# Altium PCB SENSEI_Base-Board_Clean.PcbDoc (part 7 of 7)
Units mm, origin at the board's own origin, x right, y up, seen from the top; angles counter-clockwise.
Board outline 25.2 x 15.15 mm, 8 copper layers (Top Sig/Pwr, GND1, Sig1, GND2, Sig2, Pwr, GND3, Bot Sig/Pwr), stack 1.53 mm thick; 187 components, 192 nets, 951 pads, 1831 vias.
Unrouted connection lines stored in the file: 214.
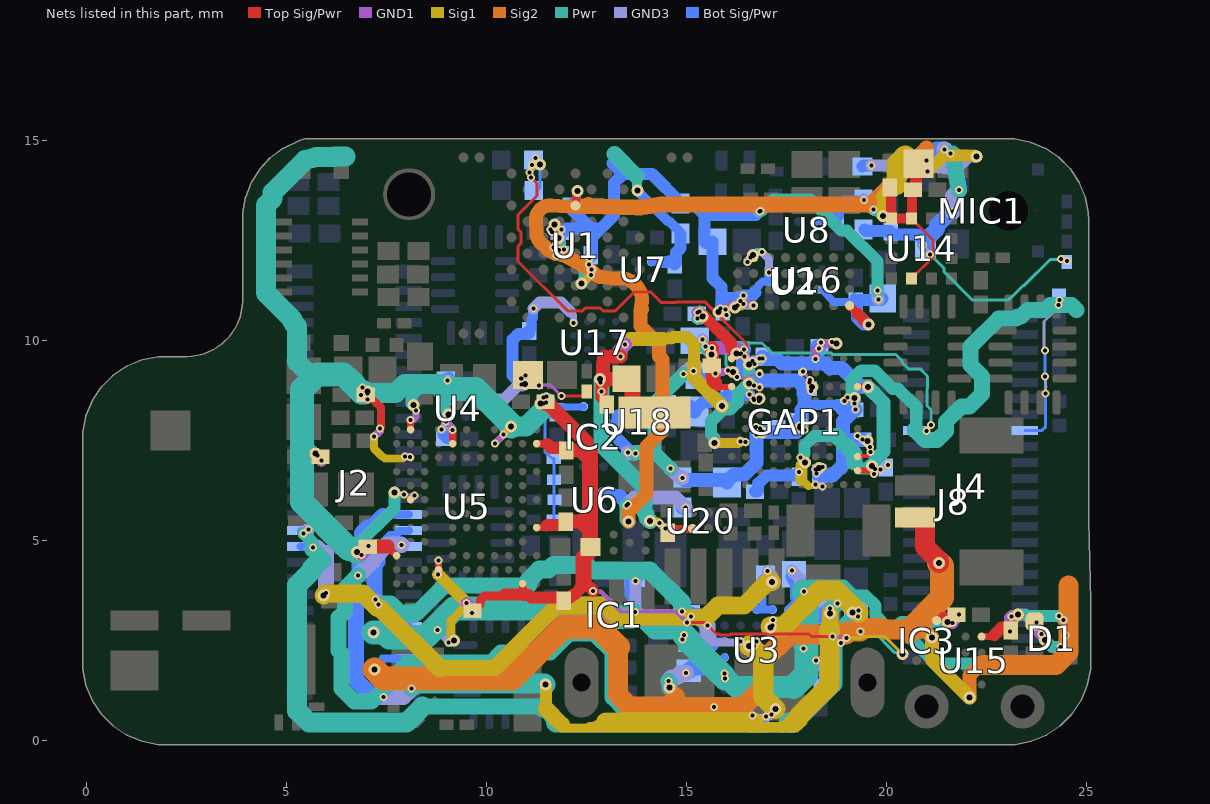
[diagram p12: the nets of this part, all layers, seen from the top]

## Via types
v1: diameter 0.2, hole 0.1, Top Sig/Pwr to GND1, 467 vias
v2: diameter 0.2, hole 0.1, GND3 to Bot Sig/Pwr, 431 vias
v3: diameter 0.2, hole 0.1, GND1 to Sig1, 369 vias
v4: diameter 0.3, hole 0.15, Sig1 to Pwr, 279 vias
v5: diameter 0.2, hole 0.1, Pwr to GND3, 270 vias
v6: diameter 0.3, hole 0.15, Top Sig/Pwr to Bot Sig/Pwr, tented both sides, 15 vias

## Nets (pads, with @x,y where several pads share a name; then routed paths per layer and width w, separated by ;. In a path a pad name is that pad's centre, name@x,y a point inside that pad or via, vN(x,y) a via of type N, cw(c..) or ccw(c..) an arc to the next point about the centre after c; other vN are vias at no path point) (continued)
V1p8_CSI2_SW: C85.1 C86.1 C87.1 GAP1.C7 U18.A1 | length 3.8
  Top Sig/Pwr w0.18: v1(16.806,8.488) 16.813,8.488 GAP1.C7@16.825,8.5
  GND1 w0.18: v3(16.684,8.514) 16.69,8.514 16.712,8.492 16.803,8.492 v1(16.806,8.488)
  GND3 w0.18: v2(16.575,8.65) v5(16.675,8.55)
  Sig1 w0.18: v3(16.684,8.514) 16.69,8.514 16.705,8.53 16.798,8.53 v4(16.821,8.553)
  Pwr w0.18: v4@16.784,8.517 v4(16.821,8.553) ; v4@16.818,8.55 v5(16.675,8.55) v4@16.818,8.55 ; v4@16.818,8.55 v4(16.821,8.553) ; v4@16.818,8.55 v4(16.821,8.553)
  Bot Sig/Pwr w0.2: U18.A1@13.975,8.175 13.982,8.175 14.182,8.375 14.275,8.375
  Bot Sig/Pwr w0.3: C87.1@15.2,8.226 15.2,8.25 15.403,8.453 15.573,8.453 15.676,8.557 15.994,8.557 16.025,8.588 C86.1@16.025,8.634 v2@16.566,8.634
  Bot Sig/Pwr w0.35: 14.275,8.375 14.544,8.375 C85.1@14.55,8.381 ; C85.1@14.55,8.409 C85.1@14.55,8.381 ; C87.1@15.2,8.226 15.069,8.357 14.556,8.357 14.55,8.363 C85.1@14.55,8.381
V_GAP9: C25.1 C26.1 C27.1 C28.1 C29.1 C30.1 C31.1 C32.1 C55.1 C56.1 C84.1 GAP1.A8 GAP1.B10 GAP1.C5 GAP1.F5 GAP1.F9 GAP1.G2 GAP1.J7 GAP1.K3 J4.13 R5.2 R14.2 R15.2 R22.2 U18.A2 | length 49.6
  Top Sig/Pwr w0.075: v1(11.112,14.076) 11.263,13.925 11.263,13.621 10.787,13.146 10.787,12.785 10.863,12.71 10.863,12.431 10.787,12.356 10.787,11.975 12.025,10.737 12.392,10.737 12.467,10.813 12.833,10.813 12.908,10.737 13.214,10.737 13.689,11.212 14.105,11.212 14.361,10.957 14.74,10.957 14.743,10.96 15.467,10.96 16.512,9.915 16.512,9.777 16.489,9.755 16.489,9.594 GAP1.B10@16.47,9.575 ; GAP1.F9@17.875,9.2 17.887,9.2 v1(17.915,9.229) ; GAP1.G2@18.225,6.75 v1(18.253,6.776) v1(18.253,6.776)
  Top Sig/Pwr w0.1: GAP1.C5@16.825,7.8 16.825,7.804 v1(16.829,7.808) ; GAP1.J7@18.925,8.5 18.936,8.5 v1(18.944,8.493) ; GAP1.K3@19.275,7.1 19.291,7.116 19.507,7.116 19.594,7.203 v1(19.594,7.219)
  Top Sig/Pwr w0.15: 15.775,8.831 15.797,8.831 15.809,8.843 16.118,8.843 GAP1.A8@16.125,8.85 ; v1(16.45,9.6) 16.45,9.575 GAP1.B10@16.475,9.55
  Top Sig/Pwr w0.18: v1(17.851,7.829) 17.851,7.824 GAP1.F5@17.875,7.8
  Top Sig/Pwr w0.2: 15.713,8.953 15.713,8.894 15.775,8.831
  Top Sig/Pwr w0.35: C56.1@15.629,9.375 v1(15.629,9.82) ; C56.1@15.631,9.358 15.675,8.991 15.713,8.953
  GND1 w0.075: v3(11.072,14.201) 11.092,14.181 11.092,14.096 v1(11.112,14.076) ; v1(17.915,9.229) 17.915,9.207 18.088,9.035 v3(18.088,9.013) ; v3(18.251,6.674) v1(18.253,6.776) v1(18.253,6.776)
  GND1 w0.1: v3@16.734,7.823 v3(16.731,7.84) ; v1(18.944,8.493) 18.944,8.495 19.018,8.57 v3(19.018,8.572) ; v3(19.586,7.335) 19.59,7.331 19.59,7.223 v1(19.594,7.219) ; v3(16.731,7.84) v1(16.829,7.808) v3(16.731,7.84)
  GND1 w0.15: v3(16.359,9.682) 16.363,9.682 16.446,9.6 v1(16.45,9.6)
  GND1 w0.18: v1(17.851,7.829) 17.855,7.825 17.88,7.825 17.941,7.764 v3(17.946,7.764)
  GND1 w0.35: v1(15.629,9.82) 16.046,9.825 cw(c16.05,9.5) 16.094,9.822 16.122,9.818 cw(c16.075,9.471) 16.322,9.719 v3(16.359,9.682)
  GND3 w0.075: v5(11.132,14.391) 11.156,14.414 11.156,14.465 11.218,14.527 v2(11.218,14.561) ; v5(18.075,8.95) 18.091,8.934 18.091,8.752 v2(18.107,8.736) ; v2(23.96,9.099) 23.975,9.084 23.975,8.833 ; v2(23.96,9.752) 23.937,9.775 23.937,10.475 24.149,10.686 24.149,10.736 v5(24.301,10.888) ; v2(23.975,8.674) 23.975,8.833 ; 23.989,8.846 23.975,8.833 ; v5@24.31,10.888 24.31,11 v2(24.32,11.009)
  GND3 w0.1: v2(16.746,7.651) 16.773,7.651 16.814,7.693 16.876,7.693 v5(16.896,7.712) ; v5(19.197,8.425) 19.208,8.415 19.208,8.291 v2(19.219,8.281) ; v2(19.269,7.611) 19.289,7.611 19.375,7.525 v5(19.396,7.525)
  GND3 w0.15: v5(16.336,9.663) 16.336,9.67 v2@16.429,9.764 ; v5@16.359,9.673 16.349,9.683 v2@16.429,9.764 ; v2@16.429,9.764 v2(16.429,9.771) v2@16.429,9.764
  GND3 w0.18: v2(17.825,7.875) 17.829,7.879 17.893,7.879 17.954,7.94 v5(17.959,7.94)
  GND3 w0.2: v2(18.225,6.775) 18.285,6.835 v5(18.392,6.835)
  GND3 w0.35: v2(13.532,7.197) 13.549,7.181 v5(13.719,7.181) ; v5(14.593,6.807) 14.836,6.564 v2(14.9,6.564) ; v5(14.927,9.169) 15.003,9.245 v2(15.173,9.245)
  Sig1 w0.075: v3(11.072,14.201) 11.1,14.201 11.303,14.404 v4(11.332,14.404) ; v3(18.088,9.013) 18.109,8.991 18.109,8.857 v4(18.13,8.836) ; v3(18.251,6.674) 18.251,6.753 v4(18.312,6.813)
  Sig1 w0.1: v3(16.731,7.84) v4(16.884,7.701) ; v3(19.018,8.572) 19.022,8.568 19.195,8.568 v4(19.199,8.565) ; v4(19.524,7.487) 19.524,7.433 19.567,7.39 19.567,7.354 v3(19.586,7.335)
  Sig1 w0.15: v4(16.251,9.676) 16.254,9.679 16.356,9.679 v3(16.359,9.682)
  Sig1 w0.18: v4(17.839,7.822) 17.871,7.822 17.925,7.768 17.942,7.768 v3(17.946,7.764)
  Pwr w0.075: v5(11.132,14.391) 11.139,14.397 11.325,14.397 v4(11.332,14.404) ; v5(18.075,8.95) 18.075,8.891 v4(18.13,8.836)
  Pwr w0.1: v4@19.198,8.426 v4@19.198,8.564 ; v5(19.396,7.525) 19.486,7.525 v4(19.524,7.487) ; v4(16.884,7.701) v5(16.896,7.712) v5(16.896,7.712) v4@16.884,7.701
  Pwr w0.15: v4(16.251,9.676) 16.323,9.676 v5(16.336,9.663)
  Pwr w0.18: v4@17.84,7.822 v5@17.958,7.94
  Pwr w0.2: v4(18.312,6.813) 18.37,6.813 v5(18.392,6.835)
  Pwr w0.31: v4(19.199,8.565) 19.124,8.639 19.124,9.013 19.361,9.251 19.702,9.251 20.158,8.795 20.288,8.795 20.744,8.339 20.744,7.81 20.716,7.782
  Pwr w0.35: v5(13.719,7.181) 13.719,7.194 13.725,7.2 14.2,7.2 ; v5(14.593,6.807) 14.2,7.2 ; v5(14.927,9.169) 14.2,8.442 14.2,7.2
  Pwr w0.4: 20.716,7.782 20.716,7.756 20.954,7.518 21.265,7.518 21.484,7.738 21.484,7.966 21.873,8.355 22.075,8.355 22.39,8.669 22.39,9.098 22.103,9.385 22.103,9.856 22.799,10.552 23.228,10.552 23.28,10.604 23.361,10.604 23.521,10.763 23.965,10.763 24.09,10.888 24.626,10.888 24.75,10.763
  Bot Sig/Pwr w0.075: R14.2@11.307,13.786 11.336,13.815 R15.2@11.336,14.514 ; J4.13@23.455,7.75 23.881,7.75 23.975,7.844 v2(23.975,8.674) ; v2@23.96,9.099 v2(23.96,9.752)
  Bot Sig/Pwr w0.2: 13.275,8.125 13.325,8.175 U18.A2@13.575,8.175 ; v2(18.225,6.775) 18.238,6.775 18.319,6.694 C27.1@18.319,6.67
  Bot Sig/Pwr w0.25: 13.263,7.941 13.263,7.906 13.262,7.905 13.262,7.563 13.3,7.525 ; 17.934,8.506 17.942,8.497 18.048,8.392 18.733,8.392 18.735,8.39 18.77,8.39
  Bot Sig/Pwr w0.3: 13.263,7.941 13.275,7.953 13.275,8.125 ; 13.3,7.525 13.532,7.293 v2(13.532,7.197) ; 18.77,8.39 18.806,8.39 18.831,8.365
  Bot Sig/Pwr w0.35: R5.2@14.9,6.575 v2(14.9,6.564) 14.95,6.514 15.971,6.514 C32.1@16.007,6.478 ; C55.1@15.305,9.125 C55.1@15.327,9.125 ; C32.1@16.007,6.453 C32.1@16.007,6.478 ; C26.1@16.4,9.75 16.421,9.771 v2(16.429,9.771) ; C26.1@16.406,9.744 16.406,9.327 16.734,9 17.771,9 17.925,8.846 17.925,8.683 17.942,8.666 17.942,8.497 17.942,8.334 17.877,8.269 17.877,8.011 C25.1@17.862,7.995 ; C25.1@17.814,8.011 C25.1@17.86,8.011 ; v2@17.86,7.829 17.741,7.711 16.805,7.711 v2(16.746,7.651) 16.746,6.958 16.444,6.656 16.185,6.656 C32.1@16.007,6.478 ; v2@17.863,7.829 C25.1@17.863,7.994 ; C27.1@18.305,6.623 18.652,6.623 18.914,6.885 18.914,7.519 ; 18.831,8.365 18.915,8.281 v2(19.219,8.281) ; C31.1@19.199,8.268 19.153,8.268 19.147,8.261 19.147,8.216 18.914,7.983 18.914,7.519 ; v5(19.396,7.525) 19.389,7.519 18.914,7.519
V_GAP9_reg: C21.1 R5.1 U6.A1 | length 23.4
  Sig2 w0.35: 11.236,13.019 11.246,12.681 ccw(c11.596,12.691) 11.401,12.4 ; 11.236,13.02 cw(c11.586,13.029) 11.605,13.379 12.254,13.343 ccw(c12.277,13.742) 12.426,13.371 12.546,13.419 ; 11.402,12.4 cw(c11.181,12.066) 11.493,12.317 ccw(c11.803,12.57) 11.713,12.18 11.869,12.144 cw(c11.753,11.632) 11.942,12.122 12.015,12.094 12.575,11.772 cw(c12.375,11.425) 12.67,11.695 ccw(c12.927,11.933) 12.888,11.585 ; 12.889,11.585 13.18,11.554 ccw(c13.223,11.951) 13.274,11.554 cw(c13.346,11.034) 13.346,11.559 ; 13.347,11.559 cw(c13.347,11.034) 13.831,11.237 13.854,11.182 cw(c13.485,11.028) 13.88,10.965 13.846,10.757 ; v4(13.551,5.48) 13.551,5.721 13.992,6.162 13.992,7.352 14.392,7.751 14.392,9.523 14.307,9.607 14.307,9.898 13.846,10.359 13.846,10.757 ; 13.885,10.795 13.846,10.757
  Sig2 w0.4: 12.481,13.369 13.757,13.325 ccw(c13.775,13.75) 13.832,13.329 14.354,13.4 19.6,13.4 21,14.8
  GND3 w0.35: v5(13.503,5.878) 13.503,5.885 v2(13.53,5.911) ; v5@13.533,5.908 13.7,6.075 14.725,6.075 v2(14.975,5.825)
  Pwr w0.35: v5(13.503,5.878) 13.503,5.527 v4(13.551,5.48)
  Bot Sig/Pwr w0.2: U6.A1@12.9,6.225 13.159,6.225 13.265,6.119 13.322,6.119
  Bot Sig/Pwr w0.35: 13.322,6.119 v2(13.53,5.911) ; R5.1@14.9,5.825 v2(14.975,5.825)
V_GAP_MEM: C5.1 C6.1 C7.1 C8.1 C9.1 C10.1 C11.1 C97.1 C98.1 C99.1 R8.2 U1.G6 U1.G7 U1.H9 U1.J5 U2.A1 U2.A7 U2.A8 U2.D7 U16.5 | length 28.8
  Top Sig/Pwr w0.075: v1(16.272,10.875) U2.A8@16.275,10.875
  Top Sig/Pwr w0.2: v1(11.804,12.264) 11.804,12.196 U1.G6@11.825,12.175 ; U1.H9@12.225,13.375 12.235,13.385 12.235,13.673 12.277,13.715 v6(12.277,13.742) ; U1.J5@12.625,11.775 v1(12.625,11.782) ; U2.A8@16.275,10.853 U2.A8@16.275,10.875 ; v1(16.601,12.075) U2.D7@16.675,12.075 ; U2.A7@16.675,10.875 v1(16.677,10.871) ; U2.A1@19.075,10.875 19.275,10.675
  Top Sig/Pwr w0.3: 19.275,10.675 19.275,10.667 v6(19.541,10.401)
  GND1 w0.2: v3(11.639,12.71) v1(11.825,12.575) ; v3(11.671,12.332) 11.705,12.298 11.77,12.298 v1(11.804,12.264) ; v3(12.612,11.643) 12.625,11.656 v1(12.625,11.782) ; v3(15.975,10.776) 16.073,10.875 v1(16.272,10.875) ; v3(16.428,10.91) 16.434,10.904 16.644,10.904 v1(16.677,10.871) ; v3(16.527,11.961) 16.527,12.002 v1(16.601,12.075)
  GND3 w0.2: v5(11.6,12.775) v2(11.875,12.775) ; v2(11.742,12.126) 11.784,12.126 v5(11.937,12.279) ; v5(12.564,11.908) 12.573,11.917 v2(12.573,12.065) ; v2(15.844,10.799) 15.844,10.794 v5(15.993,10.645) ; v5(16.343,10.984) 16.424,11.065 v2(16.424,11.128) ; v5(16.881,12.21) 17.066,12.026 v2(17.066,11.7)
  GND3 w0.3: v2(16.819,13.231) 16.824,13.237 v5(16.844,13.237) ; v5(19.775,11.25) 19.775,11.05 v2(19.8,11.025)
  Sig1 w0.2: v3(11.639,12.71) v4(11.7,12.9) ; v3(11.671,12.332) 11.72,12.383 ccw(c11.574,12.521) 11.767,12.465 cw(c11.959,12.411) 11.77,12.477 v4(11.803,12.57) ; v4(12.375,11.425) 12.394,11.425 v3(12.612,11.643) ; v4(15.793,10.714) 15.812,10.733 15.931,10.733 v3(15.975,10.776) ; v4(16.207,10.827) 16.226,10.847 16.364,10.847 v3(16.428,10.91) ; v3(16.527,11.961) 16.527,11.983 16.654,12.109 v4(16.654,12.136)
  Pwr w0.2: v5(11.6,12.775) v4(11.7,12.9) ; v4(11.803,12.57) v5(11.937,12.279) ; v4(12.375,11.425) 12.394,11.444 12.394,11.738 v5(12.564,11.908) ; v4(15.793,10.714) 15.82,10.714 15.889,10.645 v5(15.993,10.645) ; v4(16.207,10.827) 16.207,10.848 v5(16.343,10.984) ; v4(16.654,12.136) 16.681,12.136 16.755,12.21 v5(16.881,12.21)
  Pwr w0.3: v5(16.844,13.237) 16.874,13.266 16.899,13.266 17.158,13.525 18.093,13.525 18.87,12.748 19.007,12.748 19.774,11.981 v5@19.774,11.243
  Bot Sig/Pwr w0.18: U16.5@18.382,11.265 18.677,10.971
  Bot Sig/Pwr w0.2: C7.1@12.121,13.4 12.137,13.416 12.182,13.416 12.248,13.481 12.248,13.686 12.277,13.715 v6(12.277,13.742) ; 16.719,11.201 16.719,11.271 16.786,11.339 16.786,11.364 16.903,11.482 17.044,11.482 17.052,11.49 C98.1@17.052,11.61 ; 18.677,10.971 19.144,10.971 19.19,11.017 C99.1@19.19,11.093
  Bot Sig/Pwr w0.3: C6.1@11.8,12.596 C6.1@11.832,12.628 ; C6.1@11.828,12.691 11.832,12.687 C6.1@11.832,12.628 ; C5.1@11.832,12.186 C6.1@11.832,12.628 ; C7.1@12.137,13.416 12.137,13.266 12.596,12.807 ; C97.1@12.582,12.077 12.631,12.127 12.631,12.575 12.863,12.807 ; 13.15,14.426 13.41,14.166 ; C10.1@15.484,12.434 15.445,12.473 15.445,13.141 ; C10.1@15.648,12.475 15.648,11.563 15.866,11.345 15.866,11.181 ; C9.1@15.922,10.726 15.907,10.726 C9.1@15.9,10.734 15.869,10.765 15.869,11.068 15.866,11.07 15.866,11.181 ; v2(16.424,11.128) 16.646,11.128 16.719,11.201 ; C11.1@16.448,11.07 15.977,11.07 15.866,11.181 ; v2(16.819,13.231) 16.729,13.141 15.445,13.141 ; v6(19.541,10.401) 19.431,10.401 19.256,10.576 19.256,10.939 C99.1@19.225,10.971 19.225,10.979 19.256,11.01 19.86,11.01 C8.1@19.9,11.05 ; C8.1@19.774,11.243 19.774,11.176 C8.1@19.9,11.05 ; v2(19.8,11.025) 19.825,11.05 C8.1@19.9,11.05 ; C6.1@11.832,12.628 12.011,12.807 12.596,12.807 ; 12.596,12.807 12.863,12.807 ; 12.863,12.807 13.181,13.125 13.181,13.937 13.41,14.166 ; 13.41,14.166 14.134,14.166 14.85,13.45 R8.2@14.85,13.425 14.876,13.399 15.187,13.399 15.445,13.141
V_GAP_MEM_reg: C39.1 R8.1 U7.A1 | length 4.1
  Pwr w0.25: 13.747,14.114 13.765,14.096 13.765,13.76 v6(13.775,13.75)
  Pwr w0.4: 13.2,14.661 13.747,14.114
  Bot Sig/Pwr w0.2: U7.A1@14.119,11.968 14.382,11.968
  Bot Sig/Pwr w0.25: v6(13.775,13.75) 13.775,13.743 14.542,12.975 14.575,12.975 14.85,12.7 R8.1@14.85,12.675
  Bot Sig/Pwr w0.3: 14.382,11.968 14.669,11.968 14.7,11.937 C39.1@14.7,11.904 14.731,11.936 14.731,12.2 14.846,12.315 14.846,12.647 R8.1@14.848,12.649
V_GAP_MIC: C90.1 MIC1.7 R10.2 R21.2 | length 9.5
  GND3 w0.075: v2(20.914,12.389) 20.914,12.359 21.089,12.184 v5(21.089,12.154) ; v5(24.356,12.041) 24.39,12.041 24.422,12.01 24.49,12.01 v2(24.513,11.986)
  GND3 w0.3: v2@21.469,14.758 v5(21.592,14.674)
  GND3 w0.4: v2(21.45,14.778) v2@21.469,14.758 ; v2(21.658,13.229) 21.658,13.612 v5(21.81,13.765)
  Pwr w0.075: v5(21.089,12.154) 21.439,11.804 21.439,11.716 22.138,11.016 23.038,11.016 23.079,11.057 23.099,11.057 23.424,11.382 23.444,11.382 24.085,12.024 24.339,12.024 v5(24.356,12.041)
  Pwr w0.4: v5(21.592,14.674) 21.595,14.671 21.649,14.671 v5(21.81,13.765)
  Bot Sig/Pwr w0.1: R21.2@24.5,11.966 24.513,11.98 v2(24.513,11.986)
  Bot Sig/Pwr w0.3: R10.2@19.448,12.783 19.485,12.746 20.079,12.746 C90.1@20.1,12.725 ; C90.1@20.084,12.694 20.121,12.657 20.731,12.657 20.763,12.625 20.865,12.625 MIC1.7@20.976,12.514
  Bot Sig/Pwr w0.4: MIC1.7@20.976,12.412 20.976,12.514 21.262,12.8 21.262,12.889 21.602,13.229 v2(21.658,13.229) ; 21.257,14.778 v2(21.45,14.778)
V_GAP_MIC_reg: C48.1 R10.1 U8.A1 | length 4
  GND3 w0.3: v2(19.429,13.518) 19.669,13.279 v5(19.669,13.273)
  Sig1 w0.3: v4(19.914,13.113) 19.914,13.552 19.953,13.59
  Sig1 w0.4: 19.953,13.59 20.25,13.888
  Sig1 w0.5: 20.25,13.888 20.25,14.419 20.396,14.566 20.457,14.626 20.47,14.626
  Pwr w0.3: v5(19.669,13.273) 19.754,13.273 v4(19.914,13.113)
  Bot Sig/Pwr w0.18: U8.A1@18.2,12.975 18.209,12.984 18.78,12.984 C48.1@18.782,12.986
  Bot Sig/Pwr w0.3: C48.1@18.75,13.084 18.781,13.115 18.781,13.306 18.957,13.482 19.382,13.482 R10.1@19.425,13.525 19.429,13.521 v2(19.429,13.518)
V_IMU: C58.1 C59.1 C60.1 R3.2 U14.2 U14.9 U14.10 | length 9.9
  Top Sig/Pwr w0.075: U14.2@20.625,11.55 21.158,12.083 21.158,12.515 U14.9@20.625,13.049
  Top Sig/Pwr w0.2: 20.64,13.4 cw(c20.665,13.4) 20.665,13.425
  Top Sig/Pwr w0.25: C58.1@20.098,13.85 20.11,13.838 20.11,13.063 U14.10@20.125,13.049 20.61,13.049 20.613,13.045 U14.9@20.613,13.043 ; U14.9@20.625,13.049 20.64,13.063 20.64,13.4 C60.1@20.64,13.772
  Top Sig/Pwr w0.3: C60.1@20.663,13.775 20.698,13.775 20.729,13.807 20.729,14.357 C59.1@20.795,14.423 20.923,14.423 ccw(c20.923,14.5) v1(21,14.5)
  Top Sig/Pwr w0.4: C59.1@20.795,14.423 C59.1@20.9,14.528
  Top Sig/Pwr w0.5: C59.1@20.684,14.402 C59.1@20.729,14.357
  GND1 w0.3: v1(21,14.5) cw(c21,14.475) 21.025,14.475 v3(21.025,14.225)
  GND3 w0.3: v2(19.625,14.375) 21.251,14.375 21.293,14.333 21.427,14.333 21.477,14.299 21.748,14.299 22.05,14.601 v6(22.248,14.601)
  Sig1 w0.3: v3(21.025,14.225) 21.425,14.625 22.2,14.625 22.224,14.601 v6(22.248,14.601)
  Bot Sig/Pwr w0.3: R3.2@19.4,14.35 19.425,14.375 v2(19.625,14.375)
V_nRF: C18.1 C64.1 C69.1 C75.1 C76.1 C77.1 C78.1 C79.1 C80.1 C81.1 IC2.A2 R1.2 R6.2 R7.2 R24.1 R26.1 R27.1 R28.1 R29.1 U3.A4 U4.A2 U5.A3 U5.B7 U5.B10 U5.B12 U5.D2 U5.E11 U5.H11 U5.K1 U5.L5 U5.L11 | length 66.8
  Top Sig/Pwr w0.075: v1(8.09,7.087) 8.09,7.085 U5.B10@8.1,7.075 ; U5.B7@8.1,6.025 v1(8.197,6.123) ; v1(15.01,2.947) 15.463,2.947 15.747,2.663 15.815,2.663 15.841,2.636 16.065,2.636 16.091,2.663 18.059,2.663 18.122,2.6 v1(18.65,2.6)
  Top Sig/Pwr w0.1: 12.417,3.945 12.463,3.945 ; 12.44,3.922 12.487,3.875 12.569,3.793 12.588,3.793 12.638,3.743 v1(12.665,3.743)
  Top Sig/Pwr w0.18: 7.527,4.848 U5.A3@7.75,4.625 ; v1(8.095,8.015) 8.098,8.012 U5.B12@8.1,7.775 U5.B12@8.1,7.775 ; U5.D2@8.8,4.275 v1@8.8,4.498 ; v1(9.146,7.761) 9.152,7.754 9.152,7.427 U5.E11@9.15,7.425 ; U5.H11@10.2,7.425 10.212,7.425 v1(10.213,7.424) ; U5.K1@10.9,3.925 10.902,3.923 10.902,3.781 11.038,3.645 ; U5.L5@11.25,5.325 11.252,5.327 11.452,5.327 11.498,5.372 ; U5.L11@11.25,7.425 11.252,7.423 11.505,7.423 11.509,7.419
  Top Sig/Pwr w0.2: v1(6.855,8.646) 6.859,8.65 C69.1@6.979,8.65 ; C69.1@7.006,8.633 7.042,8.633 7.244,8.431 7.254,8.431 7.356,8.329 7.356,7.829 v1(7.331,7.804)
  Top Sig/Pwr w0.22: C80.1@9.621,3.209 9.65,3.209 9.842,3.401 9.842,3.508 9.951,3.616 10.404,3.616 10.444,3.656
  Top Sig/Pwr w0.3: v1(5.775,7.125) 5.8,7.1 C64.1@5.85,7.1 ; 10.444,3.656 10.902,3.656 10.913,3.645 11.048,3.645 11.111,3.582 11.322,3.582 11.33,3.573 11.819,3.573 11.85,3.541 C76.1@11.881,3.573 ; 11.498,5.372 11.519,5.394 11.944,5.394 11.975,5.425 C77.1@11.975,5.471 ; 11.509,7.419 11.619,7.309 C75.1@12.023,7.309 ; C76.1@11.894,3.573 12.091,3.573 12.171,3.652 12.2,3.652 12.331,3.784 12.331,3.813 12.44,3.922 12.463,3.945 ; 12.425,3.875 12.487,3.875 12.533,3.875 v1(12.665,3.743)
  Top Sig/Pwr w0.35: C78.1@7.031,4.848 7.527,4.848 ; C75.1@11.985,7.254 12.382,7.254 ; C77.1@12.036,5.481 12.367,5.481
  Top Sig/Pwr w0.36: C79.1@11.432,8.43 11.438,8.435 C79.1@11.438,8.472 ; C79.1@11.448,8.469 11.494,8.469 12.493,7.469 12.493,7.366
  Top Sig/Pwr w0.4: 12.367,5.481 12.589,5.259 ; 12.382,7.254 12.478,7.158 ; 12.417,3.945 12.417,4.574 12.549,4.706 12.549,4.808 12.574,4.833 R1.2@12.599,4.833 12.589,4.843 12.589,5.259 ; 12.589,7.27 12.589,5.259
  GND1 w0.075: v3(7.933,6.155) 7.949,6.139 8.181,6.139 v1(8.197,6.123) ; v3(7.958,7.104) 7.966,7.095 8.081,7.095 v1(8.09,7.087) ; v1(18.65,2.6) 18.665,2.585 18.984,2.585 v3(18.999,2.57)
  GND1 w0.1: v1(12.665,3.743) 12.684,3.724 12.861,3.724 13.361,3.224 14.733,3.224 v1(15.01,2.947)
  GND1 w0.18: v3@7.956,7.094 7.959,7.091 8.086,7.091 v1(8.09,7.087) ; v1(8.095,8.015) 8.099,8.018 8.16,8.018 8.233,8.092 8.233,8.243 v3(8.237,8.247) ; v3(8.785,4.155) 8.788,4.159 8.788,4.244 8.795,4.251 8.795,4.495 v1(8.799,4.498) ; v3(8.985,7.975) 8.985,7.969 9.142,7.813 9.142,7.764 v1(9.146,7.761) ; v1(10.213,7.424) 10.213,7.429 10.421,7.637 10.421,7.646 v3(10.425,7.65)
  GND1 w0.2: v1(6.855,8.646) 6.976,8.525 v3(7.025,8.525) ; v3(7.186,7.596) 7.331,7.742 v1(7.331,7.804) ; v1(11.425,8.425) v3(11.425,8.575)
  GND1 w0.3: v1(5.775,7.125) 5.875,7.025 v3(5.875,7) ; v3(6.868,4.634) 7.048,4.814 v1(7.048,4.862) ; v3(9.503,3.439) 9.638,3.304 v1(9.638,3.189)
  GND3 w0.075: v2(17.92,2.305) 17.928,2.305 18.233,2 v2(18.24,2) ; v2(18.86,2.434) 19.012,2.586 19.012,2.636 19.094,2.718 19.331,2.718 v5(19.344,2.731)
  GND3 w0.2: v5(6.9,8.825) 7.025,8.7 v2(7.025,8.675) ; v2(8.875,7.775) 8.975,7.875 v5(8.975,8) ; v5(11.49,8.457) 11.5,8.467 v2(11.5,8.6)
  GND3 w0.22: v2(8.777,2.765) 9.052,2.489 v5(9.052,2.448)
  Sig1 w0.075: v4(7.697,6.198) 7.718,6.177 7.912,6.177 v3(7.933,6.155) ; v3(18.999,2.57) 19.012,2.583 19.163,2.583 19.182,2.564 19.358,2.564 19.393,2.599 19.957,2.599 v4(20.392,2.164)
  Sig1 w0.18: v4(8.167,8.389) 8.19,8.366 8.19,8.299 8.237,8.252 v3(8.237,8.247) ; v3(8.985,7.975) 8.989,7.978 8.989,8.066 9.047,8.124 v4(9.047,8.157) ; v3(10.425,7.65) 10.425,7.655 10.606,7.836 v4(10.606,7.851)
  Sig1 w0.2: v3(7.025,8.525) v4(7.025,8.725) ; v3(7.186,7.596) 7.186,7.302 7.388,7.101 7.399,7.101 7.454,7.046 7.9,7.046 v3(7.958,7.104) ; v4(11.351,8.425) 11.351,8.452 11.425,8.526 v3(11.425,8.575)
  Sig1 w0.22: v4(9.181,2.505) 9.181,2.526 9.11,2.598 9.11,2.999 9.503,3.393 v3(9.503,3.439)
  Sig1 w0.3: v4(5.725,7.175) 5.725,7.15 v3(5.875,7) ; v4(6.764,4.715) 6.845,4.634 v3(6.868,4.634) ; v3(8.785,4.155) 8.787,4.155 v3(9.503,3.439)
  Pwr w0.075: v5(19.344,2.731) 19.673,2.731 20.205,2.198 20.358,2.198 v4(20.392,2.164)
  Pwr w0.2: v5(6.9,8.825) 7,8.725 v4(7.025,8.725) ; v5(8.975,8) 8.975,8.057 9.075,8.157 v4@9.075,8.175 ; v4(11.351,8.425) 11.37,8.444 11.461,8.444 11.477,8.444 v5(11.49,8.457)
  Pwr w0.22: v5(9.052,2.448) 9.103,2.448 9.16,2.505 v4(9.181,2.505)
  Pwr w0.3: 5.387,7.486 5.698,7.175 v4(5.725,7.175) ; 6.608,4.805 6.691,4.805 7.697,5.81 v4(7.697,6.198) ; v4(8.167,8.389) 8.127,8.429 8.127,8.622 8.27,8.765 8.27,8.911 8.27,8.988 ; 8.931,8.786 8.931,8.273 v4(9.047,8.157)
  Pwr w0.5: 5.7,9.025 5.666,9.059 5.262,9.463 5.262,10.355 5.144,10.473 5.144,10.531 4.489,11.186 4.489,13.392 4.65,13.553 4.65,13.7 5.463,14.513 5.733,14.585 5.866,14.595 6.195,14.595 6.2,14.6 6.475,14.6 ; v4@6.933,8.69 7.724,8.69 7.945,8.911 8.27,8.911 8.806,8.911 8.931,8.786 ; v4(10.606,7.851) 10.99,7.851 11.49,8.351 v5(11.49,8.457)
  Pwr w0.6: v4(6.764,4.715) 6.695,4.784 6.564,4.784 5.387,5.961 5.387,7.486 5.387,8.781 5.763,9.157 6.411,9.157 6.519,9.049 6.532,9.049 6.577,9.004 6.579,9.004 6.877,8.706 v4@6.938,8.706 ; 8.931,8.786 9.719,8.786 10.595,7.911 10.595,7.862 v4(10.606,7.851)
  Bot Sig/Pwr w0.075: 11.456,8.443 11.456,8.406 11.456,7.227 11.634,7.05 R28.1@11.679,7.05 ; R29.1@11.679,5.525 R28.1@11.679,7.05 ; U3.A4@17.55,2.475 17.589,2.475 17.589,2.452 17.716,2.326 17.9,2.326 v2(17.92,2.305) ; R6.2@18.344,1.911 18.35,1.905 R7.2@18.35,1.375 ; R6.2@18.35,1.925 18.487,2.063 18.614,2.063 18.836,2.285 18.836,2.41 v2(18.86,2.434)
  Bot Sig/Pwr w0.18: C81.1@11.718,8.198 11.718,8.218 11.841,8.341 12.416,8.341 IC2.A2@12.425,8.35
  Bot Sig/Pwr w0.2: v2(8.875,7.775) 8.875,7.633 8.956,7.551 C18.1@8.959,7.551 8.959,7.969 U4.A2@9.083,8.093 ; C18.1@8.943,7.557 C18.1@8.966,7.534 ; 9.036,7.78 9.036,8.045 9.083,8.092 U4.A2@9.083,8.093 ; U4.A2@9.083,8.099 U4.A2@9.083,8.093 ; 11.456,8.443 11.456,8.556 v2(11.5,8.6)
  Bot Sig/Pwr w0.22: v2(8.777,2.765) 8.777,2.736 R24.1@8.8,2.712
  Bot Sig/Pwr w0.3: C18.1@9.007,7.566 9.02,7.566 9.036,7.583 9.036,7.78 ; 11.432,8.43 11.456,8.406 11.677,8.185 C81.1@11.715,8.185
V_nRF_RAM: C19.1 C82.1 C83.1 R31.2 U4.A1 U17.A4 | length 8.7
  Top Sig/Pwr w0.075: v1(11.872,8.611) 12.406,8.611 12.5,8.705 R31.2@12.5,8.725
  GND1 w0.075: v1(11.312,8.881) 11.315,8.884 11.599,8.884 v1(11.872,8.611)
  GND1 w0.3: v3(10.859,9.058) 10.926,9.125 v1(10.975,9.125)
  GND3 w0.18: 12.08,10.731 12.174,10.637 12.174,10.448 v2(12.178,10.444)
  GND3 w0.3: v2(9.025,9) 9.15,8.875 9.675,8.875 10.026,8.524 10.432,8.524 v2@10.875,8.968 ; v2(10.875,8.9) v2@10.875,8.968 ; v5(10.875,9.05) v2@10.875,8.968 ; v2(11.178,10.803) 11.178,10.807 11.325,10.954 11.857,10.954 12.08,10.731
  Sig1 w0.3: v3(10.859,9.058) 10.9,9.016 10.9,8.975 v4(10.959,8.916)
  Pwr w0.3: v5(10.875,9.05) 10.875,9 v4(10.959,8.916)
  Bot Sig/Pwr w0.18: U4.A1@9.084,8.5 9.084,8.783 ; U17.A4@12.175,10.475 12.175,10.447 v2(12.178,10.444)
  Bot Sig/Pwr w0.25: C82.1@11.12,10.299 11.12,10.528 11.16,10.569 11.16,10.785 v2(11.178,10.803)
  Bot Sig/Pwr w0.3: v2(9.025,9) v2(9.025,9) C19.1@8.979,9.045 9.025,9.045 C19.1@9.028,9.042 ; C19.1@9.056,9.07 C19.1@9.028,9.042 ; 9.084,8.783 9.084,8.837 9.056,8.866 9.056,9.013 C19.1@9.028,9.042 ; v2@10.892,8.881 10.65,9.123 10.65,10.024 10.792,10.166 11.041,10.166 C82.1@11.075,10.2 ; C82.1@11.063,10.197 C82.1@11.063,10.243
VA0: C45.1 J2.41 U3.B5 | length 25.2
  GND3 w0.2: v2(17.15,2.875) 17.15,3.003 v5(17.159,3.012) ; v2(19.289,3.099) 19.3,3.11 v5(19.3,3.25)
  GND3 w0.3: v5(5.427,5.178) 5.523,5.274 v2(5.545,5.274)
  Sig1 w0.5: v4@17.1,2.85 17.423,2.85 18.33,3.757 18.745,3.757 18.957,3.545 19.3,3.202 19.3,3.2
  Pwr w0.2: 11.715,0.305 12.539,0.305 12.559,0.325 ; v4(17.095,2.83) 17.114,2.849 17.114,2.967 v5(17.159,3.012) ; v4(19.15,3.2) 19.169,3.219 19.269,3.219 v5(19.3,3.25)
  Pwr w0.25: 12.559,0.325 12.69,0.325 12.715,0.35 12.75,0.35
  Pwr w0.26: 14.292,0.35 14.32,0.35 14.34,0.33 17.429,0.33 17.549,0.45
  Pwr w0.3: v5(5.427,5.178) 5.648,4.957 5.648,4.778 ; 12.75,0.35 14.292,0.35
  Pwr w0.4: 5.648,4.778 5.92,4.507 ; 8.403,0.852 11.391,0.852 11.411,0.832 ; 11.414,0.829 11.637,0.606 11.637,0.594 ; 18.617,2.52 18.617,2.534 19.283,3.2 v4@19.3,3.2
  Pwr w0.5: 5.847,4.514 5.63,4.298 5.63,4.249 5.266,3.884 5.266,0.743 5.559,0.45 8.001,0.45 8.403,0.852 ; 11.411,0.832 11.414,0.829 ; 11.733,0.45 11.733,0.467 ; 17.549,0.45 17.669,0.45 18.644,1.425 18.644,2.52
  Bot Sig/Pwr w0.18: J2.41@5.345,5.25 5.52,5.25 v2(5.545,5.274)
  Bot Sig/Pwr w0.2: C45.1@19.261,3.202 19.261,3.126 v2(19.289,3.099)
  Bot Sig/Pwr w0.5: C45.1@19.234,3.229 C45.1@19.261,3.202
VA1: C93.1 J2.11 U3.A5 | length 24.1
  GND3 w0.4: v2(7.425,1.091) 7.92,1.091 v5(8.128,1.3) ; v2(18.579,3.303) 18.708,3.431 v5(18.767,3.431)
  Sig1 w0.22: 11.487,0.711 11.779,0.419 11.882,0.315 12.579,0.315 12.593,0.33 ; 12.702,0.31 13.12,0.31
  Sig1 w0.25: 16.686,0.455 16.799,0.343 17.122,0.343 ; 16.799,0.325 17.14,0.325 ; 17.688,0.45 17.511,0.45 17.404,0.343 17.122,0.343 ; 17.719,0.325 17.14,0.325 ; 17.122,0.343 17.14,0.325
  Sig1 w0.26: 12.593,0.33 12.702,0.33 12.722,0.35 12.75,0.35
  Sig1 w0.3: v4@11.473,1.39 11.487,1.376 11.487,0.792 ; 12.75,0.35 12.89,0.35 12.99,0.45
  Sig1 w0.4: 11.487,0.792 11.879,0.4 ; 18.572,2.817 18.582,2.827 v4(18.582,3.177)
  Sig1 w0.5: 12.99,0.45 14.836,0.45 14.84,0.455 16.686,0.455 ; 17.688,0.45 17.792,0.554 17.792,0.593 18.572,1.373 18.572,2.817
  Pwr w0.4: v5(8.128,1.3) 8.236,1.407 ; v4(18.582,3.177) 18.582,3.246 v5(18.767,3.431)
  Pwr w0.5: 8.236,1.407 8.256,1.427 11.451,1.427 v4(11.475,1.404)
  Bot Sig/Pwr w0.2: 7.408,5.614 7.444,5.65 J2.11@8.055,5.65 ; U3.A5@17.55,2.875 17.554,2.879 17.784,2.879 17.883,2.978
  Bot Sig/Pwr w0.3: 6.725,3.484 6.725,4.011 6.775,4.061 6.775,4.616 6.829,4.671 6.829,5.124 6.884,5.179
  Bot Sig/Pwr w0.4: 6.725,3.484 6.729,3.479 6.729,1.521 7.159,1.091 v2(7.425,1.091) ; 6.884,5.179 7.031,5.326 7.12,5.326 7.408,5.614 ; 17.883,2.978 18.014,3.109 18.397,3.109 18.5,3.212 C93.1@18.5,3.223 v2(18.579,3.303)
VBAT: C14.1 J2.1 J2.2 J8.1 U3.E3 | length 32.2
  Top Sig/Pwr w0.5: J8.1@20.705,5.575 20.955,5.575 20.955,4.845 21.306,4.494 21.306,4.445 v6(21.309,4.441)
  Sig2 w0.3: v4(14.575,1.321) 14.708,1.188 14.708,1.102
  Sig2 w0.35: 20.541,2.725 20.575,2.725 20.983,2.725 v4(21.133,2.576) ; v4(22.067,1.08) 22.067,1.622 22.34,1.894 22.394,1.894
  Sig2 w0.5: 13.28,2.334 13.28,1.151 13.573,0.858 14.705,0.858 14.705,1.098 ; 14.808,0.841 16.41,0.841 16.91,1.341 16.91,1.99 17.278,2.358 17.295,2.358 17.593,2.655 18.695,2.655 ; 18.765,2.725 18.695,2.655 ; 20.6,2.7 20.575,2.725 20.558,2.742 20.52,2.78 19.934,2.78 19.9,2.814 19.436,2.814 19.347,2.725 19.05,2.725 18.98,2.655 18.695,2.655 ; 22.394,1.894 24.238,1.894 24.55,2.206 24.55,3.88
  Sig2 w0.6: v6(7.2,1.775) 7.428,1.547 10.629,1.547 11.922,2.84 12.774,2.84 13.28,2.334 ; 20.541,2.725 20.558,2.742 21.39,3.574 21.39,4.361 v6(21.309,4.441)
  GND3 w0.4: v5(14.544,1.494) 14.628,1.578 14.743,1.578 14.854,1.689 v2(14.984,1.689)
  Sig1 w0.35: v4(21.133,2.576) 21.133,2.015 v4(22.067,1.08)
  Pwr w0.4: v5(14.544,1.494) 14.575,1.462 v4(14.575,1.321)
  Bot Sig/Pwr w0.2: v6@7.175,1.775 7.175,1.777 7.4,2.002 7.4,2.05 J2.2@8.055,2.05 ; v6(7.2,1.775) 7.227,1.775 7.352,1.65 J2.1@8.055,1.65 ; 15.637,1.899 15.768,1.899 15.945,2.075 U3.E3@15.95,2.075
  Bot Sig/Pwr w0.4: v2(14.984,1.689) 14.991,1.689 C14.1@15.052,1.75 ; C14.1@15.061,1.741 15.15,1.83 15.568,1.83 15.637,1.899
VD0: C41.1 J2.42 U3.B6 U3.C6 | length 16.6
  GND3 w0.3: v2(17.021,4.234) 17.133,4.122 v4(17.133,3.96)
  GND3 w0.4: v2(5.666,4.823) 5.763,4.823 5.902,4.683 5.99,4.683 v5(5.99,3.689)
  Sig1 w0.4: 8.833,1.816 8.837,1.812 10.187,1.812 11.724,3.349 11.738,3.349 ; 13.287,3.074 15.382,3.074
  Sig1 w0.45: v4(5.922,3.622) 5.975,3.675 6.908,3.675 7.273,3.31 7.339,3.31 8.832,1.816 ; 11.738,3.349 11.764,3.375 12.986,3.375 13.287,3.074 ; 15.382,3.074 15.489,3.074 15.79,3.375 16.441,3.375 17.025,3.96 v4(17.133,3.96)
  Pwr w0.4: v4(5.922,3.622) v5(5.99,3.689)
  Bot Sig/Pwr w0.2: J2.42@5.345,4.85 5.355,4.84 5.649,4.84 v2(5.666,4.823) ; U3.C6@16.75,3.275 16.95,3.275 ; C41.1@16.975,4.121 16.9,4.046 16.9,3.325 16.95,3.275 ; U3.B6@17.15,3.275 16.95,3.275
  other v5: 17.133,3.96
VD1: C42.1 J2.9 U3.C4 | length 20.2
  GND3 w0.2: 15.987,0.735 16.104,0.618 16.562,0.618 16.569,0.625 v2(16.65,0.625) ; v5(16.684,2.36) 16.684,2.409 v2(16.75,2.475) ; v2(16.982,0.6) 17.07,0.6 v5(17.118,0.647)
  GND3 w0.3: v5(15.686,0.836) 15.707,0.836 15.808,0.735 15.987,0.735
  GND3 w0.4: v5(6.79,4.128) 7.155,4.493 7.155,4.535 7.52,4.9 7.86,4.9 v2(7.875,4.885)
  Sig1 w0.5: v4(16.558,2.365) 16.58,2.387 16.923,2.044 16.923,1.087 v4(17.217,0.793)
  Pwr w0.2: v4(16.558,2.365) 16.564,2.36 v5(16.684,2.36) ; v5(17.118,0.647) 17.118,0.666 17.217,0.765 v4(17.217,0.793)
  Pwr w0.3: 13.505,0.775 13.555,0.725 14.502,0.725 14.508,0.735
  Pwr w0.4: v5(6.79,4.128) 6.465,3.803 6.465,3.238 6.3,3.073 6.3,2.25 6.375,2.175 6.375,1.299 6.699,0.975 7.119,0.975 7.622,1.478 7.622,1.536 8.038,1.952 10.11,1.952 10.365,2.207 11.586,2.207 12.054,2.675 12.696,2.675 13.15,2.221 13.15,1.08 13.455,0.775 13.505,0.775 ; 14.508,0.735 15.585,0.735 v5(15.686,0.836)
  Bot Sig/Pwr w0.2: v2(16.65,0.625) 16.65,0.561 16.786,0.425 C42.1@16.796,0.425 ; C42.1@16.815,0.529 16.922,0.529 16.982,0.589 v2(16.982,0.6)
VD2: C43.1 J2.10 U3.D4 | length 13.3
  GND3 w0.2: 15.674,2.457 15.67,2.461 15.67,2.469 15.682,2.457 16.332,2.457 v2(16.35,2.475)
  GND3 w0.3: v2(7.224,3.525) v5@7.294,3.456 ; v2@7.228,3.529 v5@7.294,3.463
  GND3 w0.4: v5(7.294,3.403) v5@7.294,3.456 ; v5(14.884,3.222) 15.002,3.104 v2(15.105,3.104) ; v2(15.517,2.878) 15.517,2.621 15.549,2.59
  Pwr w0.4: 8.217,3.2 8.267,3.2 8.943,3.875 11.028,3.875 11.05,3.897
  Pwr w0.45: v5(7.294,3.403) 7.594,3.403 7.822,3.175 8.192,3.175 8.217,3.2 ; 11.05,3.897 11.05,4.008 11.314,4.272 11.55,4.272 11.674,4.395 12.491,4.395 12.632,4.254 14.079,4.254 14.884,3.45 v5(14.884,3.222)
  Bot Sig/Pwr w0.2: 7.277,4.824 7.588,5.135 7.72,5.135 7.825,5.24 8.045,5.24 J2.10@8.055,5.25
  Bot Sig/Pwr w0.4: v2(7.224,3.525) 7.2,3.549 7.2,4.405 7.277,4.483 7.277,4.824 ; v2(15.105,3.104) 15.075,3.134 C43.1@15.075,3.15 15.096,3.15 15.133,3.114 15.282,3.114 v2(15.517,2.878)
VOPM: C23.1 GAP1.A10 | length 2.4
  Top Sig/Pwr w0.15: 16.112,9.797 16.112,9.588 16.118,9.581 16.118,9.557 GAP1.A10@16.125,9.55
  Top Sig/Pwr w0.3: v1(15.425,10.625) 16.112,9.938 16.112,9.797
  GND1 w0.3: v3(15.275,10.7) 15.35,10.625 v1(15.425,10.625)
  GND3 w0.3: v5(15.267,10.549) 15.3,10.582 15.3,10.7 v2(15.325,10.725)
  Sig1 w0.3: v3(15.275,10.7) 15.3,10.7 v4(15.4,10.6)
  Pwr w0.3: v5(15.267,10.549) 15.35,10.55 v4(15.4,10.6) 15.35,10.6 v5@15.3,10.55
  Bot Sig/Pwr w0.15: C23.1@15.254,10.675 15.374,10.675 C23.1@15.431,10.618
VQPS_FUSE_1V8: GAP1.C9 J4.14 | length 8.4
  Top Sig/Pwr w0.15: GAP1.C9@16.825,9.2 16.828,9.197 v1(16.828,9.163)
  GND1 w0.075: v3(16.257,9.088) 16.281,9.065 16.368,9.065 16.37,9.062 16.538,9.062 16.615,9.14 16.805,9.14 v1(16.828,9.163)
  GND3 w0.075: v2(20.997,7.743) 20.997,7.762 21.109,7.874 v5(21.109,7.893)
  Sig1 w0.075: v4(16.163,9.22) 16.163,9.183 v3(16.257,9.088)
  Pwr w0.075: v4(16.163,9.22) 16.152,9.22 15.989,9.384 15.989,9.785 16.143,9.939 16.887,9.939 17.13,9.695 18.607,9.695 18.653,9.649 20.235,9.649 20.379,9.505 20.379,9.463 20.547,9.295 20.843,9.295 21.011,9.127 21.011,9.099 21.024,9.086 21.024,8.805 21.011,8.793 21.011,8.657 21.011,8.521 21.011,8.369 21.109,8.271 v5(21.109,7.893)
VRAR_OUT: C33.1 C34.1 C35.1 C36.1 C37.1 C38.1 C49.1 C50.1 C95.1 GAP1.B4 GAP1.C8 GAP1.C10 GAP1.G1 GAP1.G10 GAP1.K2 GAP1.K8 L7.2 U20.A2 | length 32.2
  Top Sig/Pwr w0.15: GAP1.B4@16.475,7.45 16.475,7.459 v1(16.477,7.461) ; v1(16.825,8.831) GAP1.C8@16.825,8.85 ; GAP1.G10@18.225,9.545 GAP1.G10@18.225,9.55 ; GAP1.K2@19.275,6.75 19.277,6.748 19.593,6.748 19.674,6.666 v1(19.688,6.666) ; GAP1.K8@19.275,8.85 19.277,8.848 19.527,8.848 v6(19.529,8.846)
  Top Sig/Pwr w0.2: v1(14.475,5.3) 14.475,5.246 C95.1@14.525,5.196 14.525,5.214 14.606,5.295 15.145,5.295 U20.A2@15.15,5.3
  Top Sig/Pwr w0.3: 12.875,9.05 12.875,8.575 13,8.45 C50.1@13,8.404
  Top Sig/Pwr w0.35: 12.876,9.007 12.999,9.007 13,9.009 13,9.035 13.006,9.042 13.47,9.042 13.523,8.989 C49.1@13.523,8.95 ; 12.911,9.037 12.911,9.374 12.95,9.6 ; 13.137,9.6 v1(13.349,9.6)
  Top Sig/Pwr w0.4: C49.1@13.523,8.95 13.648,9.075 13.648,8.4 13.848,8.2 L7.2@14.2,8.2
  GND1 w0.15: v3(16.342,7.479) 16.351,7.47 16.468,7.47 v1(16.477,7.461) ; v3(16.679,8.88) 16.688,8.87 16.772,8.87 16.811,8.831 v1(16.825,8.831) ; v3(16.694,9.416) v3(16.694,9.416) 16.825,9.548 v1(16.825,9.55) ; v1(18.225,6.4) 18.235,6.39 18.274,6.39 18.304,6.36 18.39,6.36 v3(18.4,6.35) ; v1(19.688,6.666) 19.698,6.676 19.698,6.767 19.711,6.781 v3(19.711,6.794)
  GND1 w0.2: v3(14.32,5.434) 14.454,5.3 v1(14.475,5.3) ; v1(18.226,9.545) 18.226,9.76 18.39,9.924 18.432,9.924 ; 18.433,9.925 18.598,9.925 v3(18.634,9.96)
  GND1 w0.25: v1(13.349,9.6) v1@13.349,9.673
  GND1 w0.3: v3(12.85,8.95) 12.85,8.75 v1(12.875,8.725)
  GND1 w0.35: v1@13.349,9.673 13.349,9.793 v3(13.458,9.903)
  GND3 w0.15: v5(16.647,9.494) v5@16.657,9.504 ; v2@16.88,9.552 v2(16.893,9.552) ; v2(17.808,6.714) 17.817,6.723 17.817,6.863 17.842,6.887 17.842,7.065 v5(17.852,7.075) ; v5(19.85,6.775) 19.864,6.775 19.973,6.884 20.027,6.884 v2(20.037,6.894)
  GND3 w0.2: v2(18.313,9.796) 18.365,9.849 v5(18.365,9.951)
  GND3 w0.25: v5@16.657,9.504 16.831,9.504 v2@16.88,9.552
  Sig1 w0.15: v4(16.555,8.923) 16.584,8.894 16.651,8.894 16.665,8.88 v3(16.679,8.88) ; v4(16.556,9.403) 16.562,9.409 16.688,9.409 v3(16.694,9.416) ; 18.047,6.361 18.262,6.361 18.263,6.36 18.39,6.36 v3(18.4,6.35) ; v4(19.637,6.863) 19.64,6.863 19.708,6.794 v3(19.711,6.794)
  Sig1 w0.2: v4(12.839,9.041) 12.81,9.07 12.822,9.035 v3(12.85,8.95) ; v4(14.08,5.495) 14.099,5.476 14.279,5.476 v3(14.32,5.434) ; 17.878,6.529 18.047,6.361 ; v3(18.634,9.96) 18.647,9.948 18.726,9.948 v4(18.745,9.928)
  Sig1 w0.25: v4(15.694,7.435) 16.297,7.435 v3(16.342,7.479)
  Sig1 w0.3: 14.407,10.038 14.428,10.058 14.616,10.058 14.654,10.096 15.005,10.096 15.181,9.92 15.181,9.427 ; 17.878,6.529 17.878,6.874 v4(17.962,6.958)
  Sig1 w0.35: v3(13.458,9.903) 13.593,10.038 14.407,10.038 ; 15.181,9.427 15.181,9.073 v4(15.89,8.364)
  Pwr w0.15: v4(16.556,9.403) v5(16.647,9.494) ; v4(19.637,6.863) 19.724,6.787 v5(19.85,6.775)
  Pwr w0.2: v5(17.852,7.075) 17.962,6.964 v4(17.962,6.958) ; v5(18.365,9.951) 18.372,9.943 18.73,9.943 v4(18.745,9.928)
  Pwr w0.25: 16.284,8.448 16.284,8.505
  Pwr w0.3: v4(15.694,7.435) 15.694,7.567 15.606,7.655 15.606,7.966 15.965,8.325 16.039,8.325 16.09,8.275 ; v4@15.915,8.275 16.09,8.275 ; 16.284,8.448 16.263,8.448 16.09,8.275 ; 16.284,8.505 16.284,8.671 16.536,8.923 v4(16.555,8.923) ; v4@16.555,8.942 16.555,9.394 v4@16.561,9.4 ; 17.943,7.166 17.943,7.369 18.184,7.61 18.748,7.61 ; 19.2,6.95 19.349,6.801 19.575,6.801 19.575,6.875 19.725,7.025
  Pwr w0.35: v6(19.529,8.846) 19.924,8.451 19.924,7.224 19.725,7.025
  Pwr w0.4: v4@12.876,9.007 12.876,7.387 13.953,6.31 13.953,5.714 14.001,5.666 14.001,5.574 v4(14.08,5.495) ; 18.748,7.61 19.2,7.158 19.2,6.95
  Bot Sig/Pwr w0.3: C34.1@16.712,6.227 16.758,6.227 16.789,6.258 16.789,6.422 17.001,6.633 C36.1@17.777,6.633 ; C36.1@17.808,6.597 v2(17.808,6.714)
  Bot Sig/Pwr w0.35: v2(16.893,9.552) C37.1@16.9,9.559 ; C37.1@16.9,9.596 C37.1@16.9,9.559 ; 18.268,9.425 18.472,9.425 18.578,9.319 18.878,9.319 19.352,8.846 C38.1@19.397,8.846 v6(19.529,8.846) ; C33.1@18.32,9.856 18.274,9.856 18.268,9.85 18.268,9.578 18.115,9.425 17.381,9.425 17.262,9.544 16.906,9.544 16.9,9.55 C37.1@16.9,9.559
VSAFE: C24.1 GAP1.A9 | length 1.7
  Top Sig/Pwr w0.18: v1(16.031,9.246) GAP1.A9@16.125,9.2
  GND1 w0.2: v3(15.725,9.175) v1(16.031,9.246)
  GND3 w0.3: v2(15.4,10.025) 15.4,9.925 v5(15.475,9.85)
  Sig1 w0.3: v4(15.625,9.65) 15.625,9.275 v3(15.725,9.175)
  Pwr w0.3: v5(15.475,9.85) 15.475,9.8 v4(15.625,9.65)
  Bot Sig/Pwr w0.15: C24.1@15.202,10 C24.1@15.442,9.761
VSYS: C15.1 C40.1 C44.1 C61.1 C92.1 C94.1 D1.1 IC1.A1 IC1.B1 IC3.A2 J2.3 J2.4 U3.A6 U3.E2 U3.E4 U15.A2 | length 36.7
  Top Sig/Pwr w0.18: IC3.A2@21.25,3 21.262,3 21.392,3.13 21.747,3.13 C94.1@21.767,3.15 ; U15.A2@22.375,2.6 22.379,2.604 22.657,2.604 22.696,2.643
  Top Sig/Pwr w0.3: 22.696,2.643 22.874,2.821 C61.1@23.036,2.821
  GND1 w0.3: v3(21.65,2.936) 21.65,2.988 21.807,3.145 v1(21.807,3.152) ; v1(23.091,2.721) 23.091,3.068 v3(23.127,3.104) ; v1(23.752,2.956) 23.752,2.78 v3(23.87,2.662)
  GND3 w0.2: v5(14.9,2.525) 14.937,2.562 v2(14.937,2.639) ; v2(15.95,1.675) 15.95,1.573 v5(15.965,1.558)
  GND3 w0.3: v5(13.715,3.209) 13.726,3.221 v2(13.726,3.992) ; v2(17.636,4.248) 17.831,4.054 17.831,3.828 v5(17.935,3.724) ; v5(24.311,3.12) 24.414,3.017 v2(24.424,3.017) ; v5@24.371,2.344 24.474,2.447 v2(24.474,2.63)
  Sig1 w0.2: v4(21.522,2.964) 21.541,2.945 21.642,2.945 v3(21.65,2.936)
  Sig1 w0.3: v3@23.127,3.103 23.239,3.103 v4(23.284,3.148) ; v3(23.87,2.662) 23.957,2.575 v4(23.957,2.51)
  Pwr w0.3: v5(17.935,3.724) 18.092,3.881 18.919,3.881 19.175,3.625 19.476,3.625 19.725,3.376 19.725,3.131 20.006,2.85 20.255,2.85 20.369,2.964 v4(21.522,2.964) ; 20.282,2.876 21.233,1.925 24.15,1.925 24.35,2.125 v5(24.35,2.344) 24.131,2.344 v4@23.953,2.522 ; v4(23.284,3.148) 23.472,3.148 23.5,3.12 v5(24.311,3.12)
  Pwr w0.4: 13.598,3.093 v5(13.715,3.209) 13.715,3.205 14.197,2.722 14.851,2.722 14.947,2.625
  Pwr w0.5: v5(15.965,1.558) 16.004,1.558 16.243,1.319
  Pwr w0.55: 16.266,1.343 17.677,1.343
  Pwr w0.6: v6(7.175,2.7) 7.449,2.7 7.574,2.575 8.465,2.575 9.187,3.297 12.888,3.297 13.092,3.093 13.598,3.093 ; 14.947,2.625 15.071,2.501 15.071,2.451 v5(15.965,1.558) ; 17.677,1.343 18.003,1.669 18.003,3.656 v5(17.935,3.724)
  Bot Sig/Pwr w0.075: IC1.A1@13.598,3.344 IC1.A1@13.6,3.342 ; IC1.B1@13.6,2.95 IC1.A1@13.6,3.342
  Bot Sig/Pwr w0.18: IC1.A1@13.6,3.342 IC1.A1@13.606,3.348 ; IC1.A1@13.6,3.35 13.604,3.35 IC1.A1@13.606,3.348 ; IC1.A1@13.607,3.348 13.607,3.638 13.649,3.68 ; IC1.A1@13.609,3.345 IC1.A1@13.606,3.348
  Bot Sig/Pwr w0.2: v6@7.15,2.7 7.159,2.7 7.309,2.85 J2.4@8.055,2.85 ; v6(7.175,2.7) 7.175,2.684 7.409,2.45 J2.3@8.055,2.45 ; C40.1@15.071,2.471 C40.1@15.169,2.374 ; 15.473,2.374 15.477,2.378 ; 15.641,2.378 15.695,2.378 15.789,2.471 15.946,2.471 U3.E4@15.95,2.475 ; U3.A6@17.55,3.275 17.55,3.28 17.788,3.518 17.788,3.6
  Bot Sig/Pwr w0.3: 15.477,2.378 15.641,2.378 ; v2(24.474,2.63) 24.487,2.642 C92.1@24.487,2.706
  Bot Sig/Pwr w0.35: C92.1@24.495,2.722 24.495,3.719
  Bot Sig/Pwr w0.4: 13.649,3.68 13.649,4.036 13.685,4.073 C15.1@13.705,4.073 ; v2(14.937,2.639) 14.992,2.584 C40.1@14.992,2.58 ; C40.1@14.947,2.625 C40.1@14.992,2.58 ; C40.1@15.071,2.471 C40.1@15.05,2.45 15.029,2.45 14.992,2.486 C40.1@14.992,2.58 ; 15.479,2.38 15.317,2.38 15.159,2.538 15.035,2.538 C40.1@14.992,2.58 ; C44.1@17.675,4.1 17.721,4.054 17.721,4.026 C44.1@17.775,3.972 ; C44.1@17.775,4.028 17.787,4.028 C44.1@17.787,3.986 ; 17.788,3.6 C44.1@17.788,3.985
pads on no net: E1.2 E1.3 E1.4 GAP1.C3 GAP1.C4 GAP1.E6 GAP1.F6 GAP1.F7 GAP1.G8 GAP1.G9 GAP1.K10 J1.6 J1.7 J1.8 J1.9 J1.10 J1.11 J2.56 J4.24 J4.28 J4.30 J4.32 J4.41 J4.42 J4.43 J4.44 J5.MP1 J5.MP2 J5.MP3 J5.MP4 U1.A1 U1.A12 U1.B1 U1.B12 U1.D3 U1.D5 U1.D7 U1.D9 U1.D11 U1.E2 U1.E4 U1.E6 U1.E8 U1.E10 U1.F3 U1.F9 U1.F11 U1.G2 U1.G4 U1.G9 U1.G10 U1.H3 U1.H4 U1.H11 U1.J2 U1.J10 U1.K3 U1.K4 U1.K5 U1.K6 U1.K7 U1.K8 U1.K9 U1.K11 U1.L2 U1.L4 U1.L6 U1.L8 U1.L10 U1.M2 U1.M3 U1.M5 U1.M7 U1.M9 U1.M11 U1.P1 U1.P12 U1.R1 U1.R12 U2.A2 U2.A3 U2.A4 U2.A5 U2.A6 U2.B1 U2.B2 U2.B3 U2.B4 U2.B5 U2.B8 U2.C1 U2.C8 U3.A1 U5.D11 U9.2 U9.8 U9.9 U9.10 U10.2 U10.10 U11.2 U11.10 U12.2 U12.10 U13.2 U13.10 U17.A1 U17.B1 U17.C1 U17.C4 U17.D1 U17.D2 U17.D3 Y2.4 Y3.4

## Polygon pours and split planes (outlines as drawn)
GND on GND1 "GND_L02_P019" (solid, pour order 19): 42.5,-2.5 42.5,30 -2.5,30 -2.5,10.55 5,10.55 5,-2.5
GND on Sig1 "GND_L03_P020" (solid, pour order 20): 42.5,-2.5 42.5,30 -2.5,30 -2.5,10.55 5,10.55 5,-2.5
GND on GND2 "GND_L04_P021" (solid, pour order 21): 42.5,-2.5 42.5,30 -2.5,30 -2.5,10.55 5,10.55 5,-2.5
GND on Top Sig/Pwr "GND_L01_P018" (solid, pour order 18): 42.5,-2.5 42.5,30 -2.5,30 -2.5,10.55 5,10.55 5,-2.5
GND on Bot Sig/Pwr "GND_L08_P025" (solid, pour order 25): 42.5,-2.5 42.5,30 -2.5,30 -2.5,10.55 5,10.55 5,-2.5
GND on Pwr "GND_L06_P023" (solid, pour order 23): 42.5,-2.5 42.5,30 -2.5,30 -2.5,10.55 5,10.55 5,-2.5
GND on GND3 "GND_L07_P024" (solid, pour order 24): 42.5,-2.5 42.5,30 -2.5,30 -2.5,10.55 5,10.55 5,-2.5
GND on Sig2 "GND_L05_P022" (solid, pour order 22): 42.5,-2.5 42.5,30 -2.5,30 -2.5,10.55 5,10.55 5,-2.5

## Keep-outs
Keep-Out Layer:
  lines w0.1: 7.743,14.995 7.838,14.995 ; 7.838,14.995 5.472,14.995 5.352,14.963 4.939,14.765 4.629,14.537 4.367,14.255 4.162,13.929 4.021,13.571 3.95,13.192 3.95,13 3.95,11 3.943,10.858 3.887,10.579 3.778,10.317 3.621,10.08 3.42,9.879 3.183,9.722 2.921,9.613 2.642,9.557 2.5,9.55 2,9.55 1.798,9.55 1.402,9.472 1.029,9.317 0.693,9.093 0.407,8.807 0.183,8.471 0.028,8.098 -0.05,7.702 -0.05,7.5 -0.05,2 -0.05,1.798 0.028,1.402 0.183,1.029 0.407,0.693 0.693,0.407 1.029,0.183 1.402,0.028 1.798,-0.05 23.202,-0.05 23.598,0.028 23.971,0.183 24.307,0.407 24.592,0.693 24.817,1.028 24.971,1.402 25.05,1.798 25.05,1.999 25.05,3.5 25,5.5 25,9.5 25,11.5 25,13 24.99,13.196 24.914,13.581 24.764,13.943 24.546,14.269 24.269,14.546 23.943,14.764 23.581,14.914 23.196,14.99 23,15 21.901,15 20,15 14,15 12,15 7.838,14.995

## Other copper
Top Sig/Pwr:
  pour cut-out: 25.5,5 cw(c25.5,5.5) 25,5.5 25,9.5 cw(c25.5,9.5) 25.5,10 26.5,10 cw(c26.5,9.5) 27,9.5 27,5.5 cw(c26.5,5.5) 26.5,5
  pour cut-out: 14,15 cw(c14,15.5) 13.5,15.5 13.5,16.5 cw(c14,16.5) 14,17 20,17 cw(c20,16.5) 20.5,16.5 20.5,15.5 cw(c20,15.5) 20,15
Pwr:
  pour cut-out: 10.2,7.1 11.65,5.65 11.65,5.225 12.225,5.225 12.675,5.675 12.575,5.775 12.575,6.725 12.325,6.725 11.325,7.725
  pour cut-out: 16.2,7.7 15.9,7.55 15.975,6.55 16.775,5.2 17.3,4.625 18.55,4.525 21.2,4.95 23.125,5.3 23.05,7.4 21.925,7.55 20.475,7.325 19.55,6.65 17.775,7.05 17.8,8.625 16.2,8.15

## Silkscreen, mask and mechanical layers (free items; w line width, h text height)
B.SilkS:
  drawing of 10 lines, arcs and shapes, not listed
  text "Sebastian Frey" at 2.548,8.826 h0.8 r90
  text "SENSEI v1.0" at 1.315,7.895 h0.8 r90
Mechanical 1:
  lines w0.1: 5.858,14.995 ccw(c5.858,15.495) 6.358,15.495 6.358,16.495 ; 6,15 ccw(c6,13) 4,13 4,11 cw(c2.5,11) 2.5,9.5 2,9.5 ccw(c2,7.5) 0,7.5 0,2 ccw(c2,2) 2,0 23,0 ccw(c23,2) 25,2 25,3.5 cw(c25.5,3.5) 25.5,4 26.5,4 ; 7.358,16.495 7.358,15.476 ccw(c7.838,15.476) 7.838,14.995 12,15 ccw(c12,15.5) 12.5,15.5 12.5,16.5 ; 13.5,16.5 13.5,15.5 ccw(c14,15.5) 14,15 20,15 ccw(c20,15.5) 20.5,15.5 20.5,16.5 ; 21.5,16.5 21.5,15.5 ccw(c22,15.5) 22,15 23,15 cw(c23,13) 25,13 25,11.5 ccw(c25.5,11.5) 25.5,11 26.5,11 ; 25,17 cw(c25,15) 27,15 ; 26.5,5 25.5,5 cw(c25.5,5.5) 25,5.5 25,9.5 cw(c25.5,9.5) 25.5,10 26.5,10

## Text inside footprints (layer, text, board x,y; h text height)
U14: Top 3D Body "*" at 20.51,11.385 h1.27 r90